# Altium PCB PCB2_DEMO_BOARD.PcbDoc (part 1 of 2)
Units mm, origin at the board's own origin, x right, y up, seen from the top; angles counter-clockwise.
Board outline 60.62 x 54.58 mm, 4 copper layers (Top Layer, GND, POWER, Bottom Layer), stack 0.778 mm thick; 141 components, 123 nets, 491 pads, 190 vias.
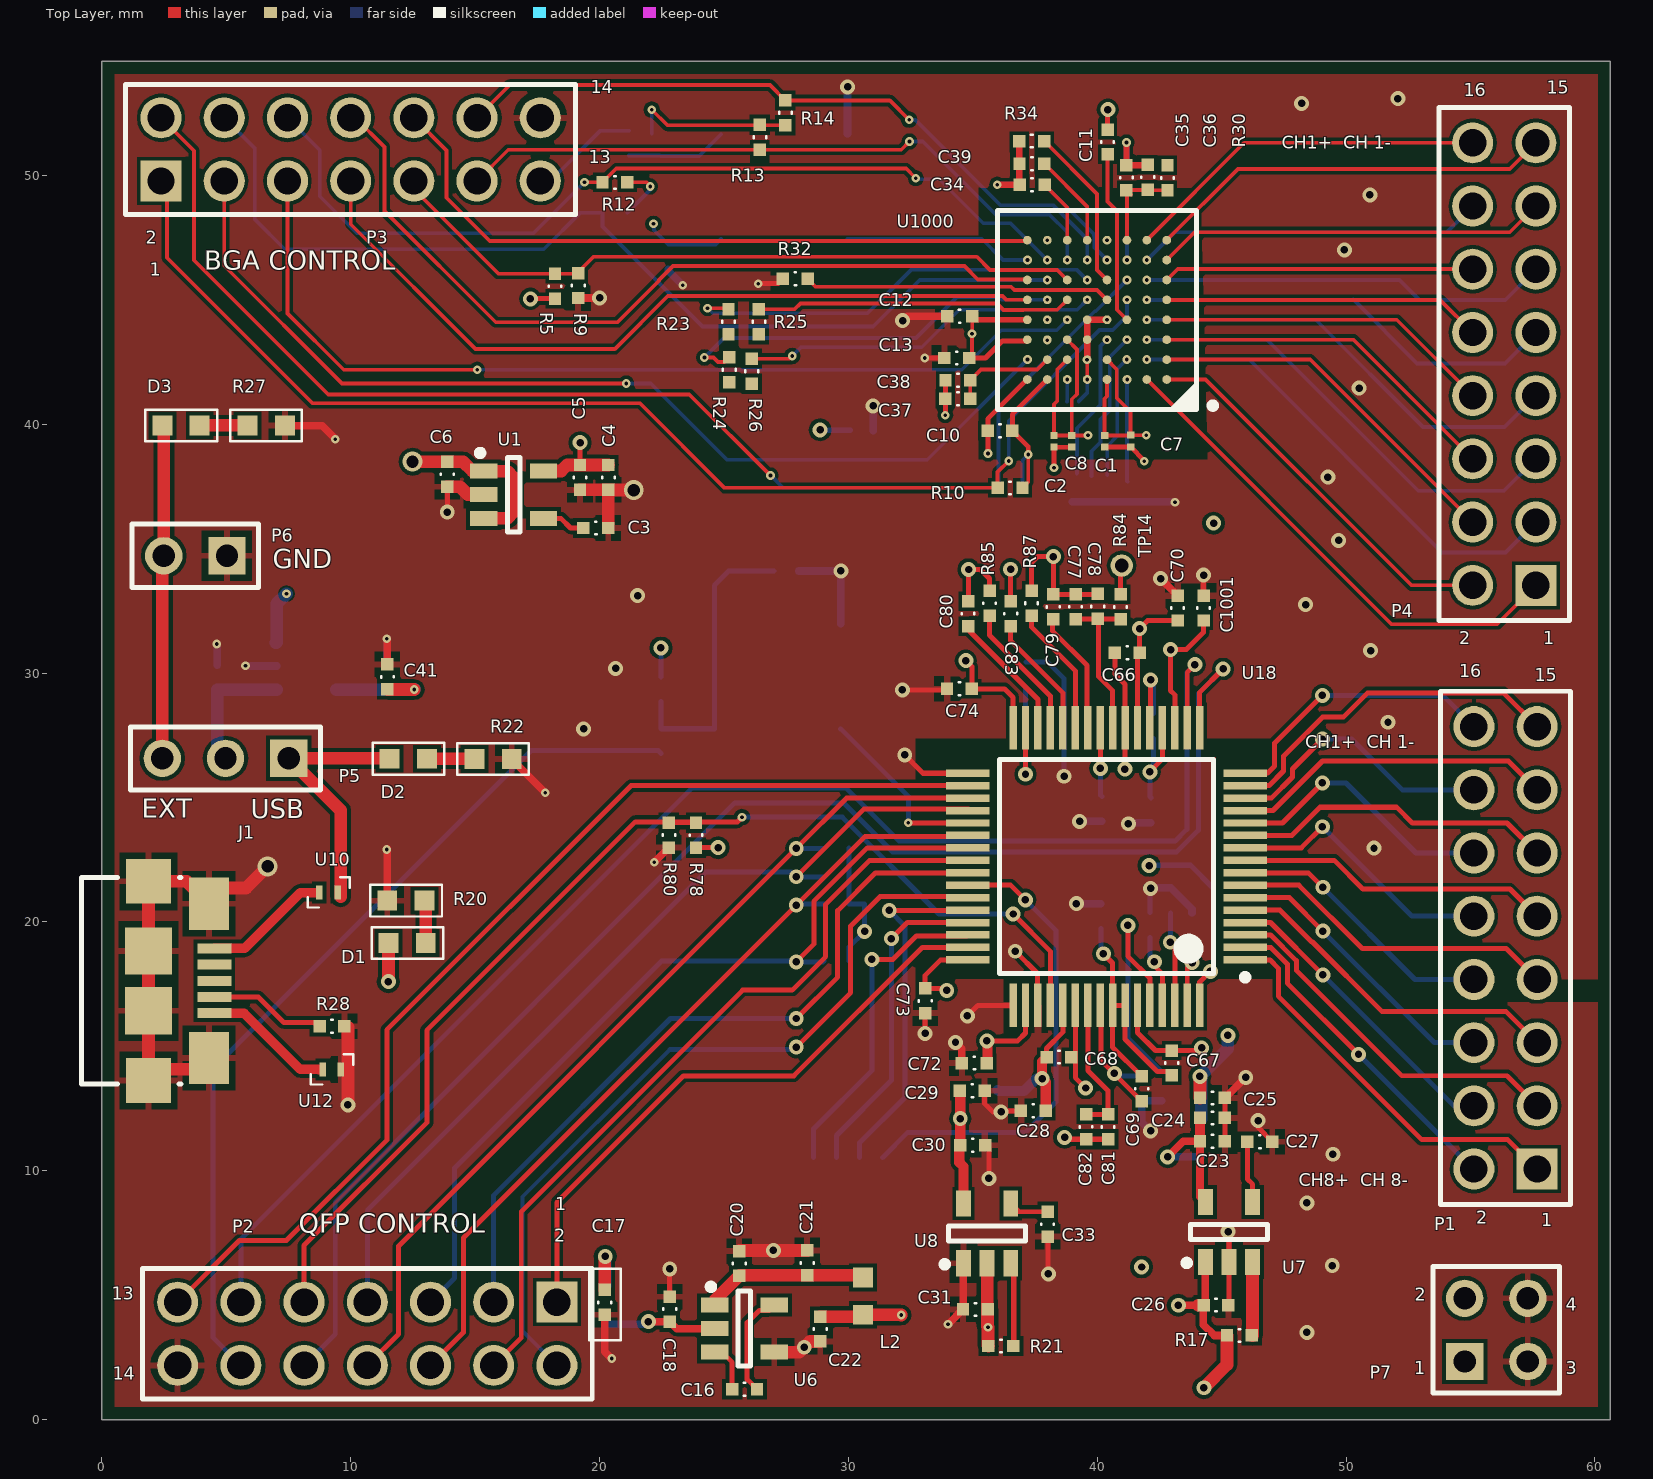
[diagram p0: Top Layer view]
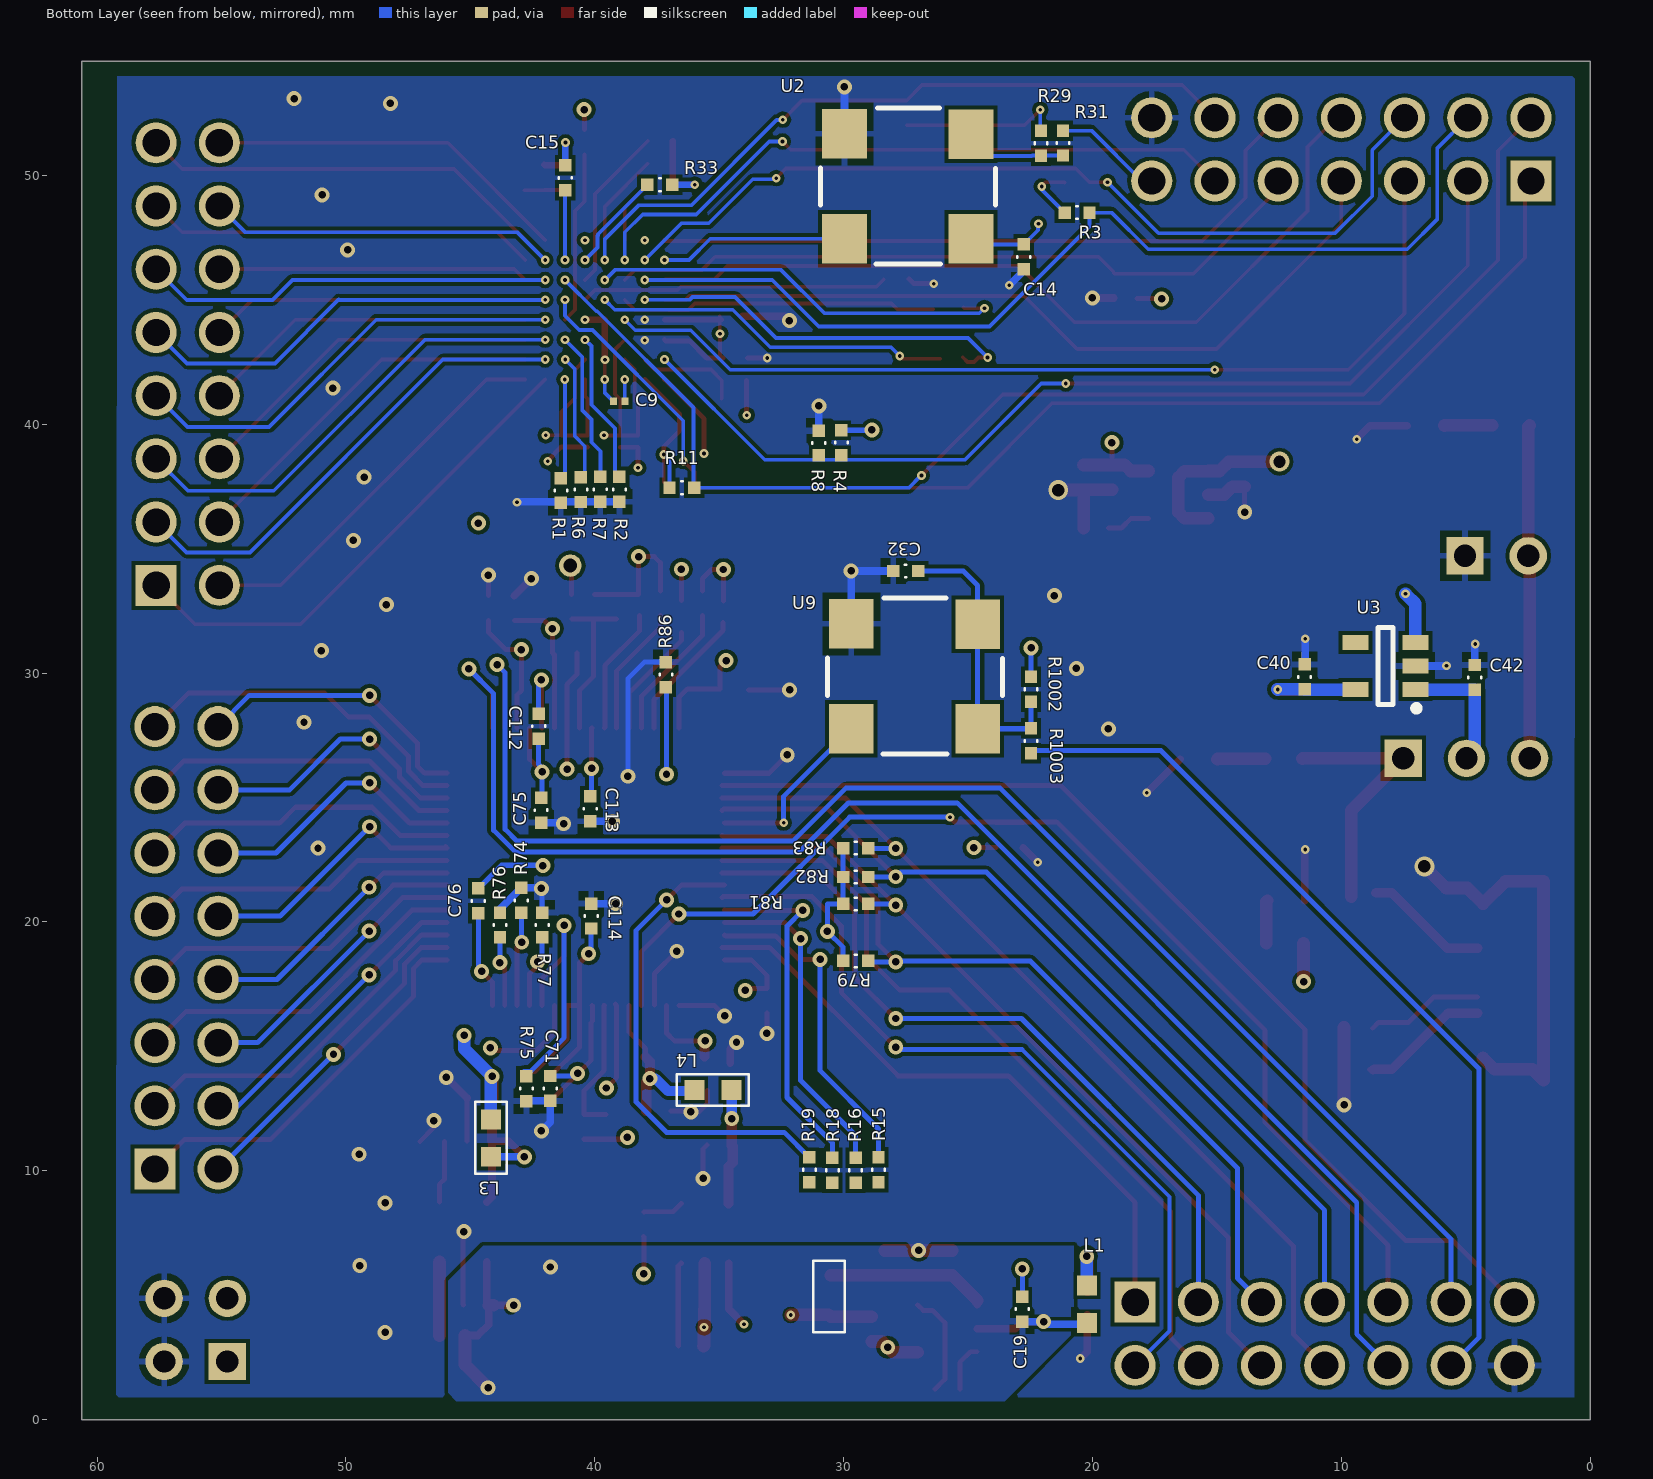
[diagram p1: Bottom Layer view, seen from below]
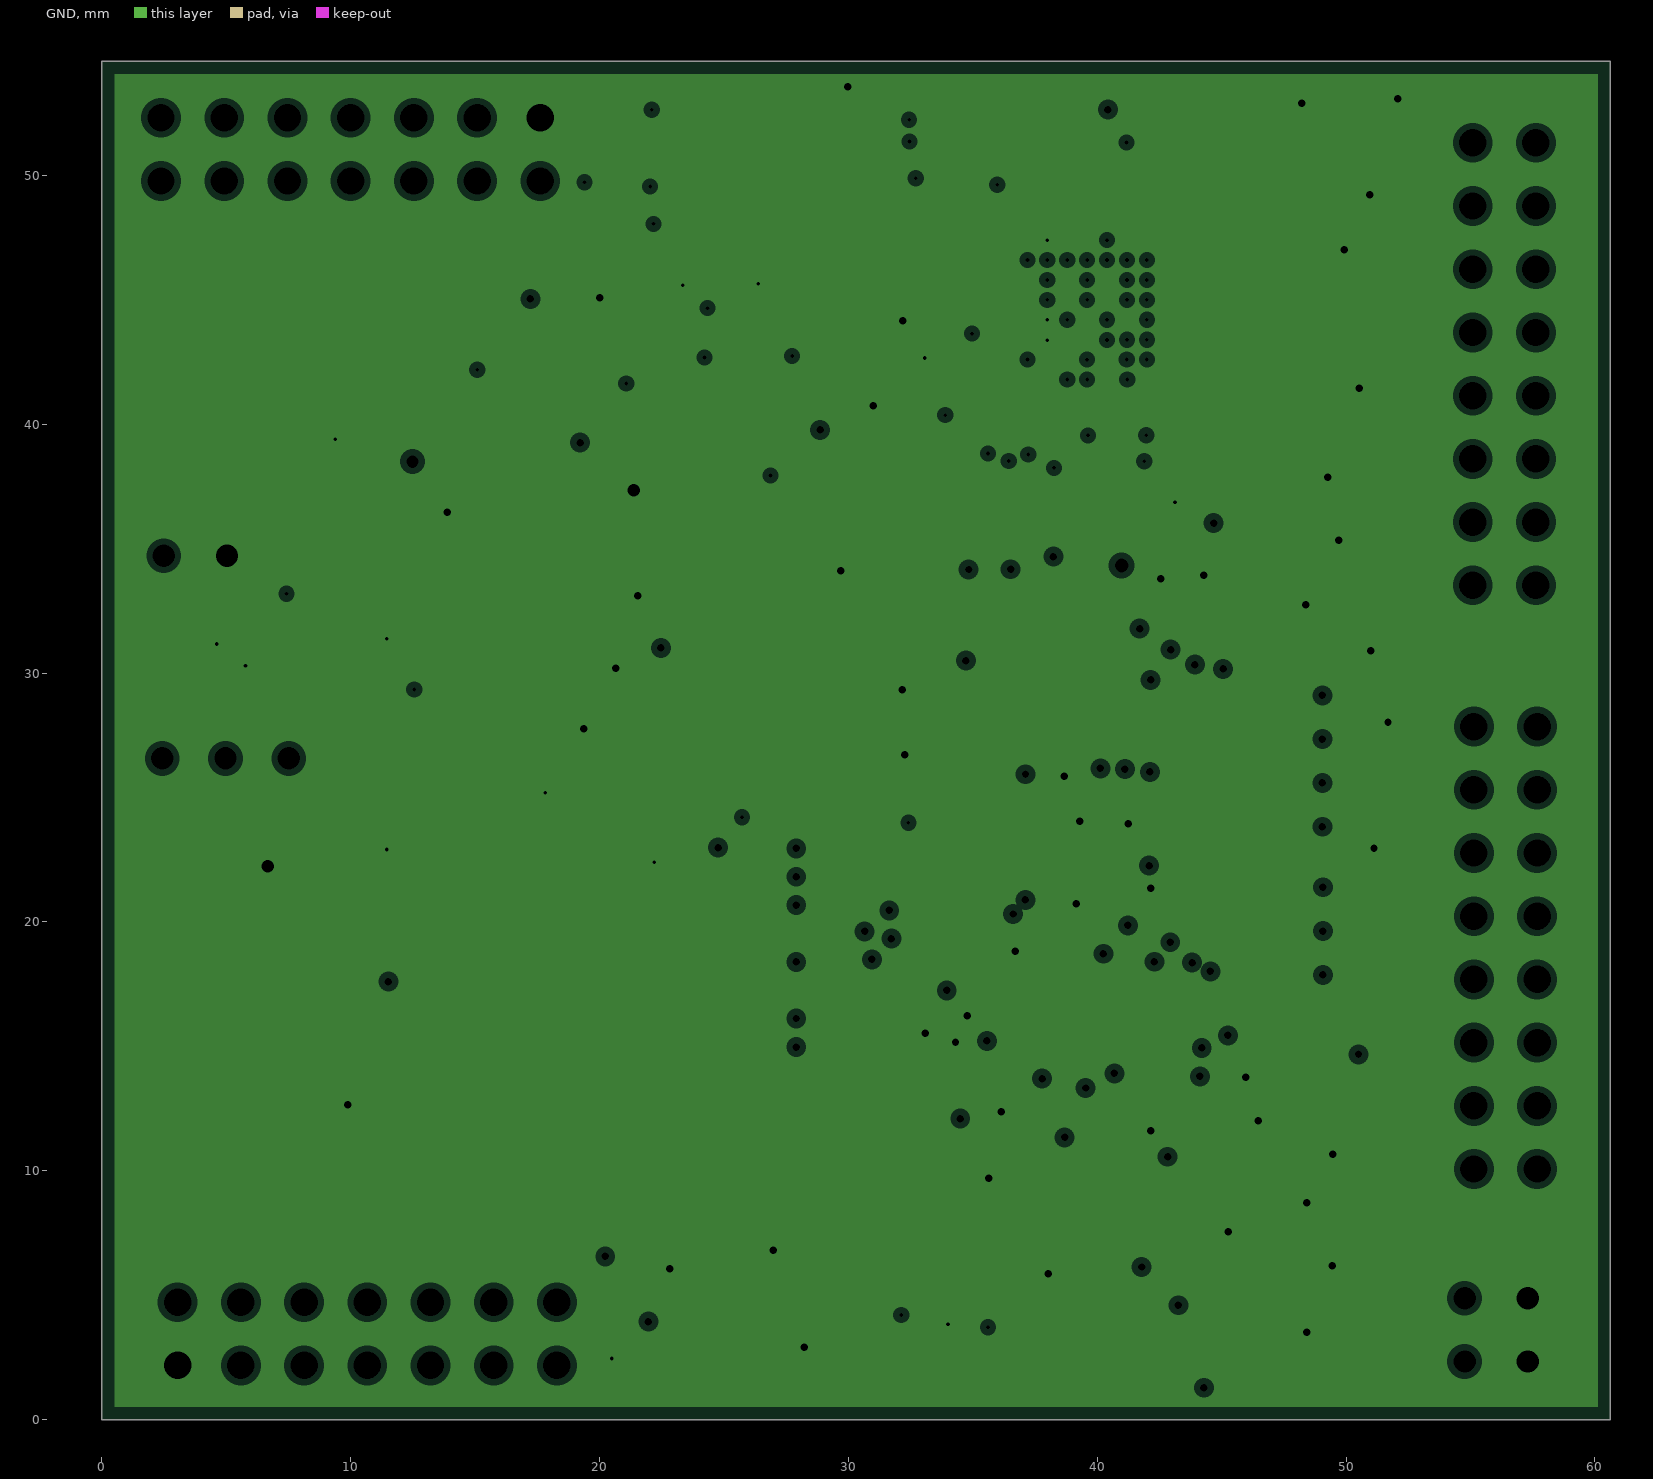
[diagram p2: GND, clearances drawn from the general rule]
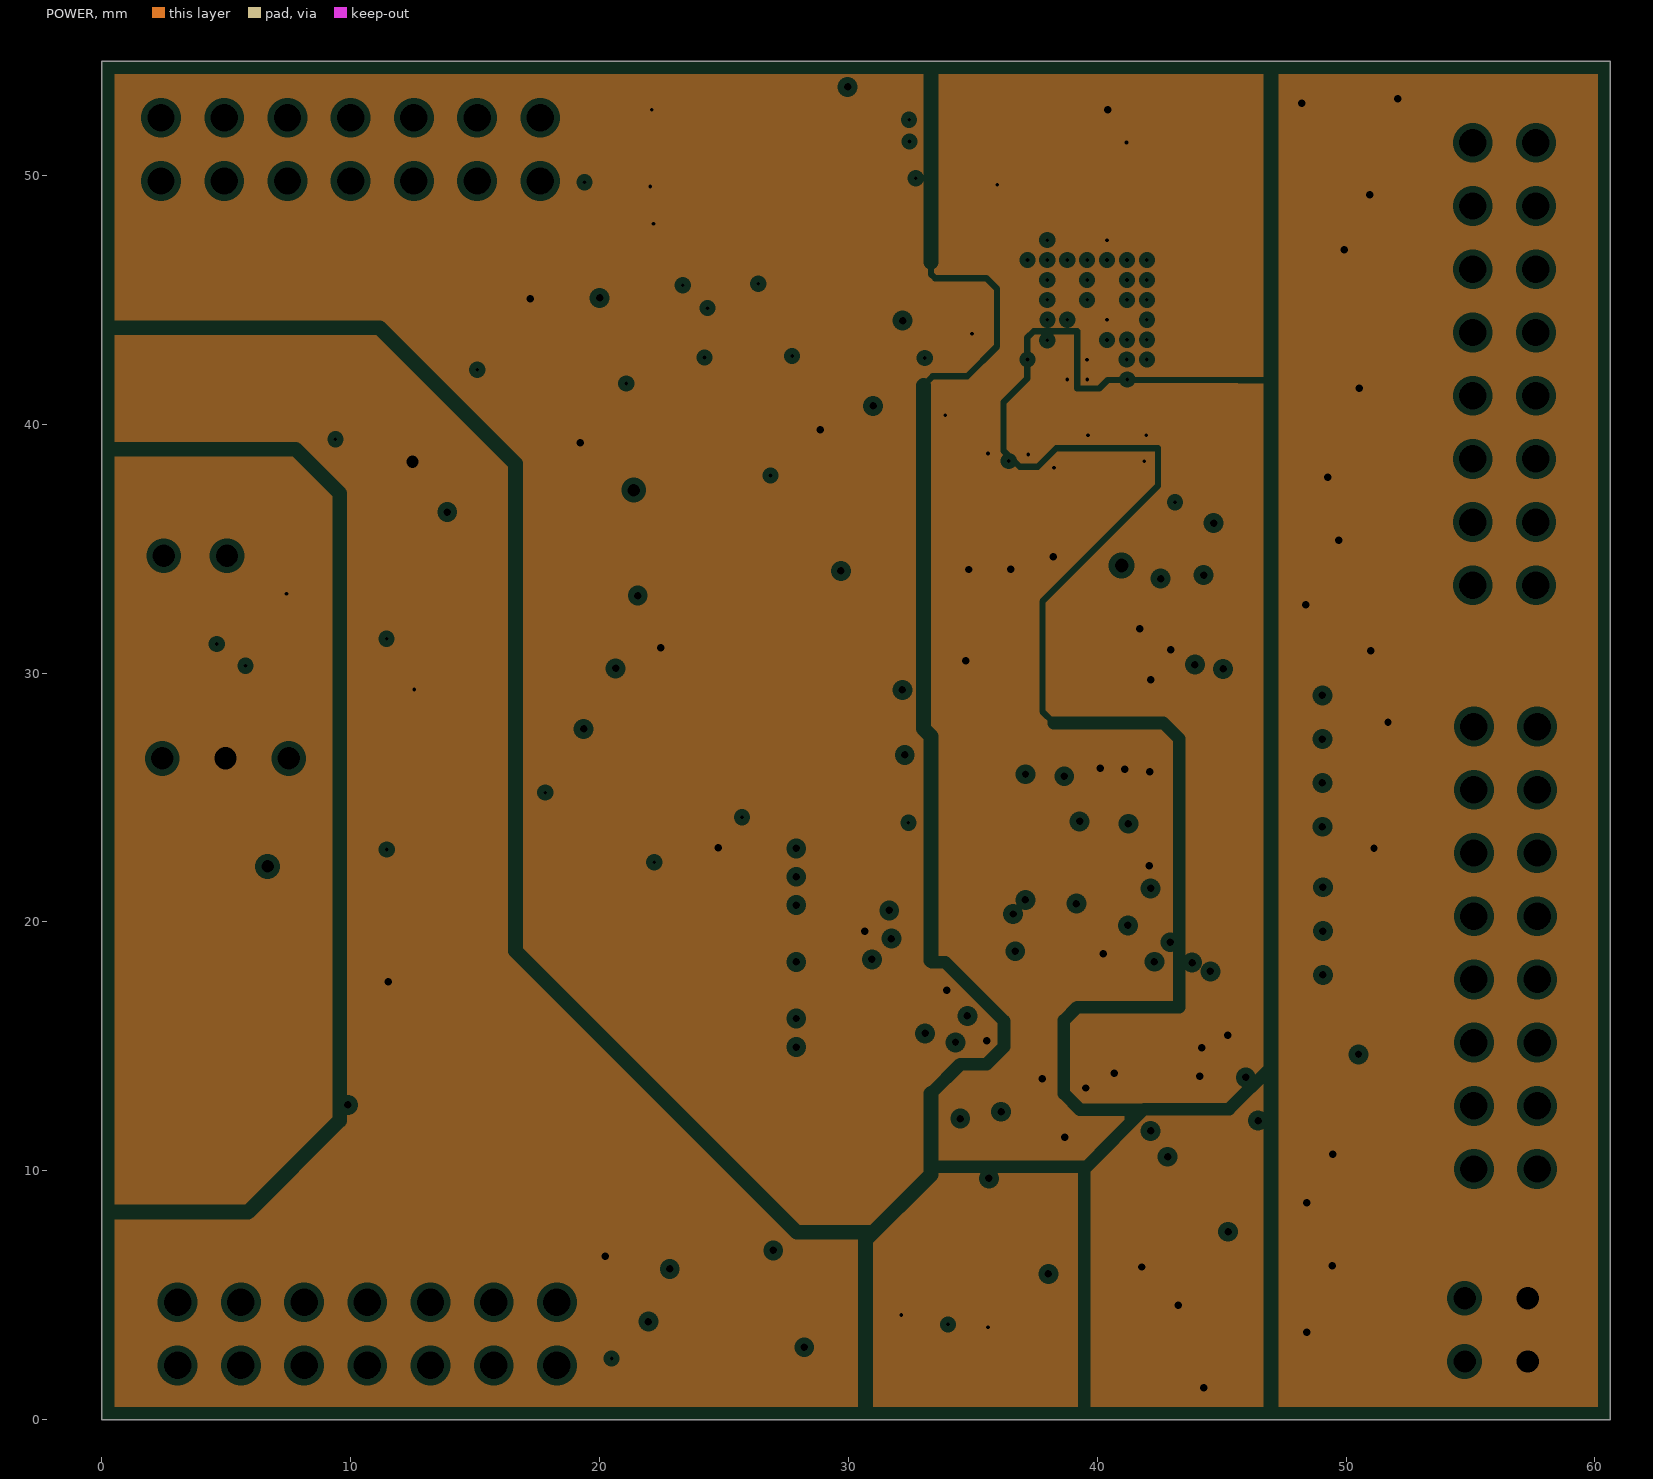
[diagram p3: POWER, clearances drawn from the general rule]

## Layer stack, top to bottom
Top Solder: solder mask 0.0102, Solder Resist, Dk 3.5
Top Layer: signal copper 0.0356
Dielectric 1: core 0.254, FR-4, Dk 4.2
GND: plane copper 0.036, net GND
Dielectric 4: prepreg 0.127, Dk 4.2
POWER: plane copper 0.036, net (Multiple Nets)
Dielectric 5: core 0.254, Dk 4.2
Bottom Layer: signal copper 0.0356
Bottom Solder: solder mask 0.0102, Solder Resist, Dk 3.5

## Board outline
0,54.576 0,0 60.621,0 60.621,54.576

## Design rules (kind name [scope] priority, off if disabled: settings)
AssemblyTestPointUsage [All] p1 off:
AssemblyTestPointUsage AssemblyTestPointUsage_1 [All] p2 off:
AssemblyTestpoint [All] p1 off: testpointundercomponent=TRUE minsize=1.016 maxsize=2.54 preferedsize=1.524 minholesize=0 maxholesize=1.016 preferedholesize=0.813 testpointgrid=0.025 usegrid=TRUE gridtolerance=0 allowsidetop=TRUE allowsidebottom=TRUE
AssemblyTestpoint AssemblyTestpoint_1 [All] p2 off: testpointundercomponent=TRUE minsize=1.016 maxsize=2.54 preferedsize=1.524 minholesize=0 maxholesize=1.016 preferedholesize=0.813 testpointgrid=0.025 usegrid=TRUE gridtolerance=0 allowsidetop=TRUE allowsidebottom=TRUE
BoardOutlineClearance [All] p1: gap=0 ignorepadtopadclearanceinfootprint=FALSE except(0.5: Poly-OutlineEdge)
Clearance [All] p1: gap=0.15 ignorepadtopadclearanceinfootprint=FALSE except(0: Arc-Hole Track-Hole SMDPad-Hole THPad-Hole Via-Hole Fill-Hole Poly-Hole Region-Hole Text-Hole)
ComponentClearance [All] p1: gap=0.2 collisioncheckmode=3 verticalgap=0.2 showdistances=FALSE
DiffPairsRouting DiffPairsRouting_USB [InDifferentialPair('USB')] p1 off: maxlimit=0.33 minlimit=0.33 mostfreqgap=0.33 toplayer_minwidth=0.191 toplayer_maxwidth=0.191 toplayer_prefwidth=0.191 bottomlayer_minwidth=0.191 bottomlayer_maxwidth=0.191 bottomlayer_prefwidth=0.191 maxuncoupledlength=12.7
DiffPairsRouting DiffPairsRouting_U [InDifferentialPair('U')] p2: maxlimit=0.33 minlimit=0.33 mostfreqgap=0.33 toplayer_minwidth=0.381 toplayer_maxwidth=0.381 toplayer_prefwidth=0.381 bottomlayer_minwidth=0.381 bottomlayer_maxwidth=0.381 bottomlayer_prefwidth=0.381 maxuncoupledlength=12.7
FabricationTestPointUsage [All] p1 off: valid=0 allowmultiple=FALSE
FabricationTestPointUsage TestPointUsage [All] p2 off: valid=0 allowmultiple=FALSE
FabricationTestpoint [All] p1 off: side=3 testpointundercomponent=TRUE minsize=1.016 maxsize=2.54 preferedsize=1.524 minholesize=0 maxholesize=1.016 preferedholesize=0.813 testpointgrid=0.025 allowsidetop=TRUE allowsidebottom=TRUE usegrid=TRUE gridtolerance=0
FabricationTestpoint Testpoint [All] p2 off: side=3 testpointundercomponent=TRUE minsize=1.016 maxsize=2.54 preferedsize=1.524 minholesize=0 maxholesize=1.016 preferedholesize=0.813 testpointgrid=0.025 allowsidetop=TRUE allowsidebottom=TRUE usegrid=TRUE gridtolerance=0
FanoutControl Fanout_LCC [IsLCC] p1: bgadir=Out bgaviamode=Centered fanoutstyle=Auto fanoutdirection=Alternating viagrid=0.025 // Fanout_LCC (Default Rule)
FanoutControl Fanout_BGA [IsBGA] p2: bgadir=Out bgaviamode=Centered fanoutstyle=Auto fanoutdirection=Alternating viagrid=0.025 // Fanout_BGA (Default Rule)
FanoutControl Fanout_Small [(CompPinCount < 5)] p3 off: bgadir=Out bgaviamode=Centered fanoutstyle=Auto fanoutdirection=OutThenIn viagrid=0.025 // Fanout_Small (Default Rule)
FanoutControl Fanout_SOIC [IsSOIC] p4: bgadir=Out bgaviamode=Centered fanoutstyle=Auto fanoutdirection=Alternating viagrid=0.025 // Fanout_SOIC (Default Rule)
FanoutControl Fanout_BGA_1 [IsBGA] p6: bgadir=Out bgaviamode=Centered fanoutstyle=Auto fanoutdirection=Alternating viagrid=0.025 // Fanout_BGA (Default Rule)
FanoutControl Fanout_LCC_1 [IsLCC] p7: bgadir=Out bgaviamode=Centered fanoutstyle=Auto fanoutdirection=Alternating viagrid=0.025 // Fanout_LCC (Default Rule)
FanoutControl Fanout_SOIC_1 [IsSOIC] p8: bgadir=Out bgaviamode=Centered fanoutstyle=Auto fanoutdirection=Alternating viagrid=0.025 // Fanout_SOIC (Default Rule)
FanoutControl Fanout_Small_1 [(CompPinCount < 5)] p9: bgadir=Out bgaviamode=Centered fanoutstyle=Auto fanoutdirection=OutThenIn viagrid=0.025 // Fanout_Small (Default Rule)
FanoutControl Fanout_Default_1 [All] p10: bgadir=Out bgaviamode=Centered fanoutstyle=Auto fanoutdirection=Alternating viagrid=0.025 // Fanout_Default (Default Rule)
HoleSize [All] p1: absolutevalues=TRUE maxlimit=1.321 minlimit=0.15 maxpercent=80.000 minpercent=20.000
HoleToHoleClearance [All] p1 off: gap=0.254 allowstackedmicrovias=TRUE
MatchedLengths [InDifferentialPair ('USB')] p1: tolerance=5 checknetsindiffpair=TRUE checkdiffpairvsdiffpair=FALSE checkxsignals=FALSE checkothers=FALSE
MinimumSolderMaskSliver [All] p1 off: minsoldermaskwidth=0.1
PlaneClearance [All] p1: clearance=0.25
PlaneConnect [All] p1: pad.planeconnectstyle=Relief pad.reliefexpansion=0.508 pad.reliefentries=4 pad.reliefconductorwidth=0.254 pad.reliefairgap=0.254 via.planeconnectstyle=Direct via.reliefexpansion=0.508 via.reliefentries=4 via.reliefconductorwidth=0.254 via.reliefairgap=0.254
PolygonConnect [all] p1: thpad.connectstyle=Relief thpad.reliefconductorwidth=0.254 thpad.reliefentries=4 thpad.polygonreliefangle="90 Angle" thpad.airgapwidth=0.254 smdpad.connectstyle=Relief smdpad.reliefconductorwidth=0.254 smdpad.reliefentries=4 smdpad.polygonreliefangle="90 Angle" smdpad.airgapwidth=0.254 via.connectstyle=Direct via.reliefconductorwidth=0.254 via.reliefentries=4 via.polygonreliefangle="90 Angle" via.airgapwidth=0.254
RoutingVias [All] p1: holewidth=0.3 width=0.6 viastyle="Blind Buried (Adjacent Layers)" minholewidth=0.15 minwidth=0.35 maxholewidth=0.6 maxwidth=0.8
ShortCircuit ShortCircuit_1 [All] p1: allowed=FALSE
ShortCircuit [All] p2: allowed=FALSE
SilkToBoardRegionClearance [All] p1 off:
SilkToSilkClearance [All] p1 off: silktosilkclearance=0.1
SilkToSolderMaskClearance SilkscreenOverComponentPads [IsPad] p1: minsilkscreentomaskgap=0.1 clearancetoexposedcopper=TRUE
SolderMaskExpansion [All] p1: expansion=0.074 istentingtop=FALSE
UnRoutedNet UnRoutedNet_1 [All] p1:
UnRoutedNet [All] p2 off:
Width Width_DIFFPAIR_U [InDifferentialPair('U')] p1: maxlimit=0.191 minlimit=0.191 preferedwidth=0.191 minimp=50.000000 maximp=50.000000 favimp=50.000000
Width Width_DIFFPAIR_USB [InDifferentialPair('USB')] p2: maxlimit=0.191 minlimit=0.191 preferedwidth=0.191 minimp=50.000000 maximp=50.000000 favimp=50.000000
Width "Width_power and gnd_1" [(InNet('AVDD') OR InNet('AVSS') OR InNet('AVDD_LOC') OR InNet('AVSS_LOC') OR InNet('VCC_33') OR InNet('VCC_33_F') OR InNet('VCC_BTOOTH') OR InNet('VCC_MEMS') OR InNet('VCC_SDCARD') OR InNet('VD12_LOC') OR InNet('VD33_LOC') OR InNet('VSYS_NEG') OR InNet('VDDA33') OR InNet('VDDD12') OR InNet('VDDD33') OR InNet('VSYS') OR InNet('VUSB') or InNet ('GND'))] p3: maxlimit=0.508 minlimit=0.15 preferedwidth=0.508 minimp=50.000000 maximp=50.000000 favimp=50.000000
Width [All] p4: maxlimit=0.508 minlimit=0.15 preferedwidth=0.2
10 further rules are at their usual default settings.

## Components (designator, comment, footprint, x,y, rotation, side; value= is the part's Value field where it differs from the comment)
C1 "0.10µF" SMD-0201C 40.292,39.31 r270 top
C2 "0.10µF" SMD-0201C 38.261,39.31 r270 top
C3 "Cap" "cap_0402_R - modified" 20.35,35.828 r180 top value=100nF
C4 "Cap" "cap_0402_R - modified" 20.358,38.36 r270 top value=1uF
C5 "Cap" "cap_0402_R - modified" 19.215,37.36 r90 top value=10nF
C6 "Cap" "cap_0402_R - modified" 13.881,37.487 r90 top value=1.0uF
C7 "0.10µF" SMD-0201C 41.337,39.321 r270 top
C8 "0.10µF" SMD-0201C 38.975,39.31 r270 top
C9 "0.10µF" SMD-0201C 39.016,40.915 r0 bottom
C10 "Cap" "cap_0402_R - modified" 36.591,39.731 r180 top value=1uF
C11 "NC" "cap_0402_R - modified" 40.412,51.839 r270 top value=1nF
C12 "Cap" "cap_0402_R - modified" 33.971,44.334 r0 top value=0.1uF
C13 "Cap" "cap_0402_R - modified" 33.853,42.659 r0 top value=0.1uF
C14 "Cap" "cap_0402_R - modified" 22.761,47.222 r270 bottom value=1uF
C15 "Cap" "cap_0402_R - modified" 41.179,50.401 r270 bottom value=1uF
C16 "Cap" "cap_0402_R - modified" 25.326,1.224 r0 top value=1uF
C17 "Cap" "cap_0402_R - modified" 20.207,5.211 r270 top value=10uF
C18 "Cap" "cap_0402_R - modified" 22.819,3.938 r90 top value=10uF
C19 "Cap" "cap_0402_R - modified" 22.819,3.938 r90 bottom value=1uF
C20 "Cap" "cap_0402_R - modified" 25.607,5.771 r90 top value=1uF
C21 "Cap" "cap_0402_R - modified" 28.339,5.797 r90 top value=10uF
C22 "Cap" "cap_0402_R - modified" 28.87,4.139 r270 top value=10uF
C23 "Cap" "cap_0402_R - modified" 44.127,11.188 r0 top value=2.2uF
C24 "Cap" "cap_0402_R - modified" 44.127,12.121 r0 top value=10uF
C25 "Cap" "cap_0402_R - modified" 44.127,12.924 r0 top value=10uF
C26 "Cap" "cap_0402_R - modified" 44.27,4.603 r0 top value=1uF
C27 "C" "cap_0402_R - modified" 46.03,11.168 r0 top value=100nF
C28 "Cap" "cap_0402_R - modified" 37.929,12.407 r180 top value=10uF
C29 "Cap" "cap_0402_R - modified" 34.476,13.216 r0 top value=2.2uF
C30 "Cap" "cap_0402_R - modified" 34.495,11.026 r0 top value=10uF
C31 "Cap" "cap_0402_R - modified" 35.604,4.425 r180 top value=2.2uF
C32 "Cap" "cap_0402_R - modified" 27.004,34.1 r0 bottom value=1uF
C33 "C" "cap_0402_R - modified" 38.006,8.351 r270 top value=10nF
C34 "Cap" "cap_0402_R - modified" 36.882,49.622 r0 top value=1uF
C35 "Cap" "cap_0402_R - modified" 41.173,50.406 r270 top value=10uF
C36 "Cap" "cap_0402_R - modified" 42.031,50.426 r270 top value=0.1uF
C37 "Cap" "cap_0402_R - modified" 33.896,41.024 r0 top value=0.1uF
C38 "Cap" "cap_0402_R - modified" 33.9,41.768 r0 top value=1uF
C39 "Cap" "cap_0402_R - modified" 36.876,50.467 r0 top value=22uF
C40 "Cap" "cap_0402_R - modified" 11.474,30.346 r270 bottom value=100nF
C41 "Cap" "cap_0402_R - modified" 11.474,29.346 r90 top value=1uF
C42 "Cap" "cap_0402_R - modified" 4.631,30.322 r270 bottom value=1.0uF
C66 "Cap" "cap_0402_R - modified" 40.705,30.812 r0 top value=1uF
C67 "Cap" "cap_0402_R - modified" 42.991,13.83 r90 top value=0.1uF
C68 "Cap" "cap_0402_R - modified" 37.962,14.569 r0 top value=1uF
C69 "Cap" "cap_0402_R - modified" 41.786,13.796 r270 top value=0.1uF
C70 "Cap" "cap_0402_R - modified" 43.229,33.11 r270 top value=1uF
C71 "Cap" "cap_0402_R - modified" 41.787,12.807 r90 bottom value=0.1uF
C72 "Cap" "cap_0402_R - modified" 34.557,14.327 r0 top value=1uF
C73 "Cap" "cap_0402_R - modified" 33.084,16.328 r90 top value=0.1uF
C74 "Cap" "cap_0402_R - modified" 34.962,29.366 r180 top value=1uF
C75 "Cap" "cap_0402_R - modified" 42.154,24.988 r270 bottom value=1uF
C76 "NC" "cap_0402_R - modified" 44.675,21.345 r270 bottom value=1000pF
C77 "Cap" "cap_0402_R - modified" 39.13,33.164 r270 top value=10uF
C78 "Cap" "cap_0402_R - modified" 40.023,33.178 r270 top value=0.1uF
C79 "Cap" "cap_0402_R - modified" 38.237,33.162 r270 top value=1uF
C80 "Cap" "cap_0402_R - modified" 34.812,32.885 r270 top value=1uF
C81 "Cap" "cap_0402_R - modified" 40.434,11.261 r90 top value=0.1uF
C82 "Cap" "cap_0402_R - modified" 39.549,11.265 r90 top value=1uF
C83 "Cap" "cap_0402_R - modified" 36.527,32.885 r270 top value=22uF
C112 "Cap" "cap_0402_R - modified" 42.256,27.363 r90 bottom value=0.1uF
C113 "Cap" "cap_0402_R - modified" 40.181,24.044 r90 bottom value=1uF
C114 "Cap" "cap_0402_R - modified" 40.142,20.734 r270 bottom value=0.1uF
C1001 "Cap" "cap_0402_R - modified" 44.27,33.11 r270 top value=1uF
D1 "LED3" 0603#1 12.266,19.146 r0 top
D2 "LED3" 0603#1 12.309,26.555 r0 top
D3 "LED3" 0603#1 3.181,39.949 r0 top
J1 "Connector Micro USB_(b)" CONNECTOR_MICRO_USB_B_TYPE 1.875,17.63 r270 top
L1 "Inductor" 0603#2 20.223,4.634 r90 bottom value=3.3uH
L2 "Inductor" 0603#2 30.59,4.962 r90 top value=3.3uH
L3 "Inductor" 0603#1 44.174,11.312 r90 bottom value=3.3uH
L4 "Inductor" 0603#1 35.246,13.248 r0 bottom value=3.3uH
P1 "Header 16" 61301621121 56.405,18.957 r90 top
P2 "Header 14" 61301421121 10.666,3.448 r180 top
P3 "Header 14" 61301421121 9.997,51.042 r0 top
P4 "Header 16" 61301621121 56.355,42.415 r90 top
P5 "Header 3" HDR1X3 7.509,26.569 r180 top
P6 "Header 2" HDR1X2 5.027,34.711 r180 top
P7 "Header 2X2" HDR2X2 54.762,2.334 r0 top
R1 "NC" "cap_0402_R - modified" 41.362,36.836 r90 bottom value=0R
R2 "NC" "cap_0402_R - modified" 39.006,36.88 r90 bottom value=0R
R3 "Res3" "res_0402_R - modified" 21.117,48.5 r180 bottom value=100K
R4 "NC" "cap_0402_R - modified" 30.09,38.757 r90 bottom value=10K
R5 "NC" "cap_0402_R - modified" 18.21,46.043 r270 top value=10K
R6 "NC" "cap_0402_R - modified" 40.558,36.873 r90 bottom value=0R
R7 "NC" "cap_0402_R - modified" 39.777,36.882 r90 bottom value=0R
R8 "NC" "cap_0402_R - modified" 30.995,39.742 r270 bottom value=10K
R9 "NC" "cap_0402_R - modified" 19.14,45.07 r90 top value=10K
R10 "" "cap_0402_R - modified" 35.995,37.441 r0 top value=10K
R11 "" "cap_0402_R - modified" 35.995,37.441 r0 bottom value=10K
R12 "Res3" "res_0402_R - modified" 21.118,49.717 r180 top value=100K
R13 "Res3" "res_0402_R - modified" 26.441,51.027 r90 top value=100K
R14 "Res3" "res_0402_R - modified" 27.465,53.008 r270 top value=100K
R15 "Res3" "res_0402_R - modified" 28.596,9.533 r90 bottom value=100K
R16 "Res3" "res_0402_R - modified" 29.519,9.525 r90 bottom value=100K
R17 "R" "cap_0402_R - modified" 46.213,3.38 r180 top value=0R
R18 "Res3" "res_0402_R - modified" 30.448,9.525 r90 bottom value=100K
R19 "Res3" "res_0402_R - modified" 31.375,9.533 r90 bottom value=100K
R20 "R" 0603#1 12.218,20.851 r0 top value=1K
R21 "R" "cap_0402_R - modified" 35.628,2.956 r0 top value=0R
R22 "R" 0603#1 15.722,26.539 r180 top value=1K
R23 "Res3" "res_0402_R - modified" 25.18,43.615 r90 top value=100K
R24 "Res3" "res_0402_R - modified" 25.211,41.691 r90 top value=100K
R25 "Res3" "res_0402_R - modified" 26.405,43.615 r90 top value=100K
R26 "Res3" "res_0402_R - modified" 26.118,41.629 r90 top value=100K
R27 "R" 0603#1 6.609,39.94 r180 top value=1K
R28 "NC" "cap_0402_R - modified" 9.749,15.805 r180 top value=0K
R29 "Res3" "res_0402_R - modified" 22.067,51.789 r270 bottom value=10K
R30 "NC" "cap_0402_R - modified" 42.822,50.399 r270 top value=0R
R31 "NC" "cap_0402_R - modified" 21.182,51.795 r270 bottom value=0R
R32 "" "cap_0402_R - modified" 28.367,45.839 r180 top value=0R
R33 "NC" "cap_0402_R - modified" 36.882,49.622 r0 bottom value=10K
R34 "NC" "res_0402_R - modified" 36.868,51.377 r0 top value=10K
R74 "NC" "cap_0402_R - modified" 42.953,21.363 r270 bottom value=0K
R75 "NC" "cap_0402_R - modified" 42.745,12.799 r90 bottom value=0K
R76 "NC" "cap_0402_R - modified" 43.807,20.375 r270 bottom value=0K
R77 "NC" "cap_0402_R - modified" 42.111,20.375 r270 bottom value=0K
R78 "NC" "cap_0402_R - modified" 23.874,23.983 r270 top value=10K
R79 "Res3" "res_0402_R - modified" 29.017,18.43 r0 bottom value=10K
R80 "NC" "cap_0402_R - modified" 22.786,22.983 r90 top value=10K
R81 "Res3" "res_0402_R - modified" 30.017,20.723 r180 bottom value=100K
R82 "Res3" "res_0402_R - modified" 29.017,21.803 r0 bottom value=100K
R83 "Res3" "res_0402_R - modified" 29.017,22.967 r0 bottom value=100K
R84 "NC" "cap_0402_R - modified" 40.937,33.159 r270 top value=0K
R85 "NC" "cap_0402_R - modified" 35.672,33.306 r270 top value=10K
R86 "NC" "cap_0402_R - modified" 37.138,29.437 r90 bottom value=0K
R87 "Res3" "res_0402_R - modified" 37.363,33.306 r270 top value=10K
R1002 "Res3" "res_0402_R - modified" 22.468,29.849 r270 bottom value=10K
R1003 "NC" "cap_0402_R - modified" 22.468,26.773 r90 bottom value=0K
TP14 "1-PIN" Testpt_055 40.981,34.317 r90 top
U1 "TPS79333" "SOT_23__DBV_(R - PDSO - G5)" 16.548,37.166 r0 top
U2 "OSC_ADS1298" "HC735 - OSC ADS1298" 24.883,47.451 r0 bottom
U3 "TLV70237" "SOT23__DDC__(R - PDSO-  G5)" 8.224,30.284 r0 bottom
U6 "TPS60403" "SOT_23__DBV_(R - PDSO - G5)" 25.821,3.657 r0 top
U7 "TPS73225" "SOT23__DDC__(R - PDSO-  G5)" 45.296,7.538 r90 top
U8 "TPS72325" "SOT23__DDC__(R - PDSO-  G5)" 35.572,7.483 r90 top
U9 "OSC_ADS1298" "HC735 - OSC ADS1298" 24.61,27.76 r0 bottom
U10 "BLM15PD121SN1" BLM15PD121SN1 9.477,21.178 r180 top
U12 "BLM15PD121SN1" BLM15PD121SN1 9.609,14.065 r180 top
U18 "ADS1298" "S-PQFP - G64 - ADS1298" 40.366,22.223 r180 top
U1000 "ADS1298CZXGR" BGA64C80P8X8_800X800X106 39.992,44.595 r180 top

## Footprints (in the part's own frame and the unit in brackets; to place one, negate y for a bottom-side part, rotate by r counter-clockwise, add the part's x,y. Pads: shape width x height; smd on the part's side, far side on the other; paste and mask are expansions set on the pad)
0603#1 [mm]
  rect 0.8x0.8 smd: 1(-0.75,0) 2(0.75,0)
  silkscreen extent -1.43,-0.64 1.45,0.64
0603#2 [mm]
  rect 0.8x0.8 smd: 1(0.75,0) 2(-0.75,0)
61301421121 [mm] "Pin Header, pitch 2.54 mm, THT, Vertical, dual row, 14p"
  rect 1.65x1.65 hole 1.1: 1(-7.62,-1.27)
  round 1.65 hole 1.1: 2(-7.62,1.27) 3(-5.08,-1.27) 4(-5.08,1.27) 5(-2.54,-1.27) 6(-2.54,1.27) 7(0,-1.27) 8(0,1.27) 9(2.54,-1.27) 10(2.54,1.27) 11(5.08,-1.27) 12(5.08,1.27) 13(7.62,-1.27) 14(7.62,1.27)
  silkscreen extent -9.04,-2.62 9.04,2.62, body extent -8.89,-2.54 8.89,2.54, height 8.59
61301621121 [mm] "Pin Header, pitch 2.54 mm, THT, Vertical, dual row, 16p"
  rect 1.65x1.65 hole 1.1: 1(-8.89,-1.27)
  round 1.65 hole 1.1: 2(-8.89,1.27) 3(-6.35,-1.27) 4(-6.35,1.27) 5(-3.81,-1.27) 6(-3.81,1.27) 7(-1.27,-1.27) 8(-1.27,1.27) 9(1.27,-1.27) 10(1.27,1.27) 11(3.81,-1.27) 12(3.81,1.27) 13(6.35,-1.27) 14(6.35,1.27) 15(8.89,-1.27) 16(8.89,1.27)
  silkscreen extent -10.31,-2.62 10.31,2.62, body extent -10.16,-2.54 10.16,2.54, height 8.59
BGA64C80P8X8_800X800X106 [mm] "BGA, 64-Leads, Body 8.00x8.00mmx1.06mm, Pitch 0.80mm"
  round 0.35 smd mask+0.075: A1(-2.8,2.8) A2(-2,2.8) A3(-1.2,2.8) A4(-0.4,2.8) A5(0.4,2.8) A6(1.2,2.8) A7(2,2.8) A8(2.8,2.8) B1(-2.8,2) B2(-2,2) B3(-1.2,2) B4(-0.4,2) B5(0.4,2) B6(1.2,2) B7(2,2) B8(2.8,2) C1(-2.8,1.2) C2(-2,1.2) C3(-1.2,1.2) C4(-0.4,1.2) C5(0.4,1.2) C6(1.2,1.2) C7(2,1.2) C8(2.8,1.2) D1(-2.8,0.4) D2(-2,0.4) D3(-1.2,0.4) D4(-0.4,0.4) D5(0.4,0.4) D6(1.2,0.4) D7(2,0.4) D8(2.8,0.4) E1(-2.8,-0.4) E2(-2,-0.4) E3(-1.2,-0.4) E4(-0.4,-0.4) E5(0.4,-0.4) E6(1.2,-0.4) E7(2,-0.4) E8(2.8,-0.4) F1(-2.8,-1.2) F2(-2,-1.2) F3(-1.2,-1.2) F4(-0.4,-1.2) F5(0.4,-1.2) F6(1.2,-1.2) F7(2,-1.2) F8(2.8,-1.2) G1(-2.8,-2) G2(-2,-2) G3(-1.2,-2) G4(-0.4,-2) G5(0.4,-2) G6(1.2,-2) G7(2,-2) G8(2.8,-2) H1(-2.8,-2.8) H2(-2,-2.8) H3(-1.2,-2.8) H4(-0.4,-2.8) H5(0.4,-2.8) H6(1.2,-2.8) H7(2,-2.8) H8(2.8,-2.8)
  silkscreen extent -4.77,-4 4,4, body extent -4,-4 4,4, height 1.06
BLM15PD121SN1 [mm] "Chip Inductor, 2-Leads, Body 1,00x0,50mm, IPC Medium Density"
  rect 0.26x0.55 smd mask+0.1: 1(0,0) 2(0.74,0)
  silkscreen extent -0.49,-0.61 1.21,0.6
"cap_0402_R - modified" [mm] "0402_R"
  rect 0.5x0.5 smd paste-0.05: 1(0,0) 2(1,0)
  silkscreen extent 0.47,-0.26 0.53,0.25, body extent -0.13,-0.25 1.14,0.25, height 0.5
CONNECTOR_MICRO_USB_B_TYPE [mm] "connettore micro usb B type"
  rect 0.4x1.35 smd: 1(-1.3,2.65) 2(-0.65,2.65) 3(0,2.65) 4(0.65,2.65) 5(1.3,2.65)
  rect 1.8x1.8 smd mask+0.2: 6(-4,0) 6(4,0)
  rect 2.1x1.6 smd mask+0.2: 6(-3.1,2.43) 6(3.1,2.43)
  rect 1.9x1.9 smd mask+0.2: 6(-1.2,0) 6(1.2,0)
  round 0.4 on Top Overlay mask+0.2: 7(-2.464,3.81)
  silkscreen extent -4.15,-2.69 4.15,1.31, body extent -4,-2.55 4,2.55, height 2.8
"HC735 - OSC ADS1298" [mm] "Footprint oscillatore ABM3B-8.000MHZ-B2-T del micro"
  rect 1.8x2 smd mask+0.2: 1(0,-4.2) 2(5.08,-4.216) 3(5.08,0) 4(0,0)
  round 1 on Bottom Overlay mask+0.2: 5(-1.906,-4.608)
  silkscreen extent -0.99,-5.26 6.05,1.02, body extent -0.03,-4.22 5.05,0, height 1.1
HDR1X2 [mm] "Connector; Header; 2 Position"
  rect 1.5x1.5 hole 0.9: 1(0,0)
  round 1.5 hole 0.9: 2(2.54,0)
  silkscreen extent -1.27,-1.27 3.81,1.27
HDR1X3 [mm] "Connector; Header; 3 Position"
  rect 1.5x1.5 hole 0.9: 1(0,0)
  round 1.5 hole 0.9: 2(2.54,0) 3(5.08,0)
  silkscreen extent -1.27,-1.27 6.35,1.27
HDR2X2 [mm] "Connector; Header; 2x2 Position"
  rect 1.5x1.5 hole 0.9: 1(0,0)
  round 1.5 hole 0.9: 2(0,2.54) 3(2.54,0) 4(2.54,2.54)
  silkscreen extent -1.27,-1.27 3.81,3.81
"res_0402_R - modified" [mm] "0402_R"
  rect 0.5x0.5 smd paste-0.05: 1(0,0) 2(1,0)
  silkscreen extent 0.46,-0.25 0.54,0.25, body extent -0.13,-0.25 1.14,0.25, height 0.3
"S-PQFP - G64 - ADS1298" [mm] "TSQFP, 64-Leads, Body 10,00x10,00mm, Pitch 0,50mm, IPC Medium Density"
  rect 1.75x0.3 smd: 1(-5.575,3.75) 2(-5.575,3.25) 3(-5.575,2.75) 4(-5.575,2.25) 5(-5.575,1.75) 6(-5.575,1.25) 7(-5.575,0.75) 8(-5.575,0.25) 9(-5.575,-0.25) 10(-5.575,-0.75) 11(-5.575,-1.25) 12(-5.575,-1.75) 13(-5.575,-2.25) 14(-5.575,-2.75) 15(-5.575,-3.25) 16(-5.575,-3.75) 33(5.575,-3.75) 34(5.575,-3.25) 35(5.575,-2.75) 36(5.575,-2.25) 37(5.575,-1.75) 38(5.575,-1.25) 39(5.575,-0.75) 40(5.575,-0.25) 41(5.575,0.25) 42(5.575,0.75) 43(5.575,1.25) 44(5.575,1.75) 45(5.575,2.25) 46(5.575,2.75) 47(5.575,3.25) 48(5.575,3.75)
  rect 0.3x1.75 smd: 17(-3.75,-5.575) 18(-3.25,-5.575) 19(-2.75,-5.575) 20(-2.25,-5.575) 21(-1.75,-5.575) 22(-1.25,-5.575) 23(-0.75,-5.575) 24(-0.25,-5.575) 25(0.25,-5.575) 26(0.75,-5.575) 27(1.25,-5.575) 28(1.75,-5.575) 29(2.25,-5.575) 30(2.75,-5.575) 31(3.25,-5.575) 32(3.75,-5.575) 49(3.75,5.575) 50(3.25,5.575) 51(2.75,5.575) 52(2.25,5.575) 53(1.75,5.575) 54(1.25,5.575) 55(0.75,5.575) 56(0.25,5.575) 57(-0.25,5.575) 58(-0.75,5.575) 59(-1.25,5.575) 60(-1.75,5.575) 61(-2.25,5.575) 62(-2.75,5.575) 63(-3.25,5.575) 64(-3.75,5.575)
  silkscreen extent -5.7,-4.3 4.3,4.57, body extent -5,-5 5,5, height 1.2
SMD-0201C [mm] "SMD-0201"
  rect 0.28x0.3 smd: 1(-0.235,0) 2(0.235,0)
  body extent -0.3,-0.15 0.3,0.15, height 0.3
"SOT23__DDC__(R - PDSO-  G5)" [mm]
  rect 1.05x0.6 smd: 1(-1.2,0.95) 2(-1.2,0) 3(-1.2,-0.95) 4(1.2,-0.95) 5(1.2,0.95)
  silkscreen extent -1.37,-1.55 0.3,1.83, body extent -0.87,-1.52 0.87,1.53, height 1.1
"SOT_23__DBV_(R - PDSO - G5)" [mm]
  rect 1.1x0.6 smd: 1(-1.2,0.95) 2(-1.2,0) 3(-1.2,-0.95) 4(1.2,-0.95) 5(1.2,0.95)
  silkscreen extent -1.47,-1.5 0.25,1.8, body extent -0.85,-1.5 0.85,1.5, height 1.45
Testpt_055 [mm]
  round 0.9 hole 0.55: 1(0,0)

## Part data
C1 C2 C7 C8 C9: library part GRT033C81A104KE01D, "CAP CER 0.1UF 10V X6S 0201", Digi-Key Part Number=490-12232-1-ND, Manufacturer="Murata Electronics North America", Operating Temperature="-55°C ~ 105°C", Package / Case="0.024\" L x 0.012\" W (0.60mm x 0.30mm)", Ratings=AEC-Q200, Temperature Coefficient=X6S, Tolerance=±10%, Voltage=10V, @ qty=0, Applications=Automotive, Datasheets=http://search.murata.co.jp/Ceramy/image/img/A01X/G101/ENG/GRT033C81A104KE01-01.pdf, Factory Stock=0, Failure Rate="Surface Mount, MLCC", Features=-, Height - Seated (Max)="0.013\" (0.33mm)", Image=//media.digikey.com/Renders/Murata%20Renders/GRT%20Series%200201%20(0603%20Metric).jpg, Lead Spacing=-, Minimum Quantity=1, Mounting Type="0201 (0603 Metric)", Packaging="Cut Tape (CT)", Part Number=GRT033C81A104KE01D, Part Status=Active, Quantity Available=1647, Series=GRT, Size / Dimension=-, Thickness (Max)=-, Unit Price (USD)=0.1
C3 C4 C5 C6 C10 C12 C13 C14 C15 C16 C17 C18 C19 C20 C21 C22 C23 C24 C25 C26 C28 C29 C30 C31 C32 C34 C35 C36 C37 C38 C39 C40 C41 C42 C66 C67 C68 C69 C70 C71 C72 C73 C74 C75 C77 C78 C79 C80 C81 C82 C83 C112 C113 C114 C1001: "Capacitor", LatestRevisionDate=17-Jul-2002, LatestRevisionNote="Re-released for DXP Platform.", PackageDescription="Radial Cap, Thru-Hole; 2 Leads; 0.3 in Pin Spacing", PackageReference=RAD-0.3, Published=8-Jun-2000, Publisher="Altium Limited"
C11 C27 C33 C76: library part Cap, "Capacitor", LatestRevisionDate=17-Jul-2002, LatestRevisionNote="Re-released for DXP Platform.", PackageDescription="Radial Cap, Thru-Hole; 2 Leads; 0.3 in Pin Spacing", PackageReference=RAD-0.3, Published=8-Jun-2000, Publisher="Altium Limited"
D1 D2 D3: "Typical BLUE SiC LED", DatasheetVersion=16-Apr-2002, LatestRevisionDate=17-Dec-2003, LatestRevisionNote="PCB Footprint replaced.", PackageDescription="SM LED; 2 C-Bend Leads; Body 3.5 x 2.8 x 1.9 mm, inc leads (LxWxH typ)", PackageReference=3.5X2.8X1.9, PackageVersion=16-Apr-2002, Published=8-Jun-2000, Publisher="Altium Limited"
J1: "CONNECTOR MICRO USB"
P1 P4: "Header, 16-Pin", LatestRevisionDate=17-Jul-2002, LatestRevisionNote="Re-released for DXP Platform.", Publisher="Altium Limited"
P2 P3: "Header, 14-Pin", LatestRevisionDate=17-Jul-2002, LatestRevisionNote="Re-released for DXP Platform.", Publisher="Altium Limited"
P5: "Header, 3-Pin", LatestRevisionDate=17-Jul-2002, LatestRevisionNote="Re-released for DXP Platform.", Publisher="Altium Limited"
P6: "Header, 2-Pin", LatestRevisionDate=17-Jul-2002, LatestRevisionNote="Re-released for DXP Platform.", Publisher="Altium Limited"
P7: "Header, 2-Pin, Dual row", LatestRevisionDate=17-Jul-2002, LatestRevisionNote="Re-released for DXP Platform.", Publisher="Altium Limited"
R1 R2 R6 R7 R17 R20 R21 R22 R27 R28 R30 R31 R32 R74 R75 R76 R77 R84 R86 R1003: library part Res2, "Resistor", LatestRevisionDate=17-Jul-2002, LatestRevisionNote="Re-released for DXP Platform.", PackageDescription="Axial Device, Thru-Hole; 2 Leads; 0.4 in Pin Spacing", PackageReference=AXIAL-0.4, Published=8-Jun-2000, Publisher="Altium Limited"
R3 R12 R13 R14 R15 R16 R18 R19 R23 R24 R25 R26 R29 R79 R81 R82 R83 R87 R1002: "Resistor", LatestRevisionDate=29-May-2009, LatestRevisionNote="IPC-7351 Footprint Added.", PackageDescription="Chip Resistor", PackageReference=J1-0603, Published=8-Jun-2000, Publisher="Altium Limited"
R4 R5 R8 R9 R10 R11 R33 R34 R78 R80 R85: library part Res3, "Resistor", LatestRevisionDate=29-May-2009, LatestRevisionNote="IPC-7351 Footprint Added.", PackageDescription="Chip Resistor", PackageReference=J1-0603, Published=8-Jun-2000, Publisher="Altium Limited"
U1: "Regulator"
U2 U3 U6 U7 U8 U9: "Linear Regulator"
U1000: "8-Channel, 24-Bit Analog-To-Digital Converter With Integrated ECG Front End", Manufacturer="Texas Instruments", PACKAGE_DESIGNATOR=ZXG, Copyright="Copyright (C) 2018 Accelerated Designs. All rights reserved", Datasheet_URL=http://www.ti.com/lit/gpn/ADS1298, FAMILY_NAME="ECG / EEG Analog Front End", GENERIC_PART_NUMBER=ADS1298, INDUSTRY_STD_PKG_TYPE=NFBGA, PIN_COUNT=64, RefDes=RefDes, Type=DEV
L1 L2 L3 L4: Code_IEC=1005, Code_JEITA=0402, LatestRevisionDate=29-May-2009, LatestRevisionNote="IPC-7351 Footprint Added.", PackageDescription="Chip Inductor", PackageReference=0402-A, Published=8-Jun-2000, Publisher="Altium Limited"

## Via types
v1: diameter 0.6, hole 0.3, Top Layer to Bottom Layer, tented both sides, 112 vias
v2: diameter 0.35, hole 0.15, Top Layer to Bottom Layer, tented both sides, 75 vias
v3: diameter 0.8, hole 0.5, Top Layer to Bottom Layer, tented both sides, 3 vias

## Nets (pads, with @x,y where several pads share a name; then routed paths per layer and width w, separated by ;. In a path a pad name is that pad's centre, name@x,y a point inside that pad or via, vN(x,y) a via of type N, cw(c..) or ccw(c..) an arc to the next point about the centre after c; other vN are vias at no path point)
AVDD: C1.1 C2.1 C7.1 C8.1 C9.1 C10.1 C25.1 C66.2 C67.2 C68.2 C69.2 C70.2 C71.2 C112.2 C1001.2 L3.2 R10.2 R11.2 U18.19 U18.21 U18.22 U18.54 U18.56 U18.59 U1000.A4 U1000.A6 U1000.A7 U1000.B4 U1000.B6 U1000.C6 | length 56
  Top Layer w0.15: R10.2@36.995,37.441 37.222,37.667 v2@37.222,38.777 ; U1000.B6@38.792,42.595 38.389,42.192 38.389,40.928 38.261,40.8 C2.1@38.261,39.545 C8.1@38.975,39.545 ; U1000.C6@38.792,43.395 39.182,43.005 39.182,41.205 38.975,40.998 C8.1@38.975,39.545 ; v2(39.631,39.55) 39.627,39.545 C8.1@38.975,39.545 ; U1000.A4@40.392,41.795 40.392,41.121 40.292,41.02 C1.1@40.292,39.545 41.326,39.545 C7.1@41.337,39.556 ; U1000.B4@40.392,42.595 40.785,42.202 40.785,41.049 41.337,40.498 C7.1@41.337,39.556 ; v2(41.967,39.554) 41.965,39.556 C7.1@41.337,39.556
  Top Layer w0.191: v2@37.222,38.777 37.222,39.1 C10.1@36.591,39.731 36.591,40.394 U1000.A7@37.992,41.795
  Top Layer w0.2: U18.54@39.162,16.694 U18.54@39.116,16.648 39.116,13.741 v1(39.533,13.324) ; U18.56@40.089,16.02 40.089,16.621 U18.56@40.116,16.648 ; U18.56@40.156,15.927 40.156,14.426 C69.2@41.786,12.796 ; U18.59@41.616,16.648 41.616,15.551 42.337,14.83 C67.2@42.991,14.83 44.091,14.83 v1(44.197,14.935) ; U18.22@41.616,27.798 41.616,30.723 C66.2@41.705,30.812 v1@41.705,31.792 ; v1(41.701,31.788) v1@41.705,31.792 ; U18.21@42.116,27.798 42.143,27.825 v1(42.143,29.72) ; U18.19@43.116,27.798 43.116,29.124 42.946,29.294 v1(42.946,30.944) 43.582,30.944 44.27,31.632 C1001.2@44.27,32.11 ; C70.2@43.229,32.11 42.023,32.11 v1@41.705,31.792
  Top Layer w0.508: v1(44.125,13.787) 44.127,13.785 C25.1@44.127,12.924
  Bottom Layer w0.15: R11.2@36.995,37.441 36.995,38.551 v2(37.225,38.78) ; C9.1@38.781,40.915 38.792,40.926 v2(38.792,41.795)
  Bottom Layer w0.2: v1(40.685,13.911) 40.789,13.807 C71.2@41.787,13.807 ; v1(42.143,29.72) 42.095,29.672 42.256,29.51 C112.2@42.256,28.363
  Bottom Layer w0.508: L3.2@44.174,12.062 44.174,13.738 v1(44.125,13.787) 45.25,14.912 v1(45.25,15.435)
AVSS: C1.2 C2.2 C7.2 C8.2 C9.2 C10.2 C11.1 C15.1 C28.1 C34.1 C35.1 C36.1 C37.1 C38.1 C39.1 C66.1 C67.1 C68.1 C69.1 C74.1 C75.1 C76.1 C77.1 C78.1 C79.1 C80.1 C81.1 C82.1 C83.1 C112.1 C113.2 C114.2 L4.2 R33.1 R34.1 R85.1 R87.1 U18.20 U18.23 U18.25 U18.32 U18.53 U18.57 U18.58 U1000.A5 U1000.A8 U1000.B5 U1000.C5 U1000.D4 U1000.D5 U1000.H4 | length 67.7
  Top Layer w0.15: v2(39.59,42.593) 39.592,42.592 v2(39.592,41.795)
  Top Layer w0.191: v2(33.893,40.362) 33.9,40.369 C38.1@33.9,41.768 ; v2(35.607,38.82) 35.607,40.21 U1000.A8@37.192,41.795 ; v2(38.265,38.244) 38.261,38.247 C2.2@38.261,39.075 C8.2@38.975,39.075 ; C1.2@40.292,39.075 40.302,39.086 C7.2@41.337,39.086 41.891,38.531 v2(41.891,38.509)
  Top Layer w0.2: C80.1@34.827,32.898 v1(34.827,34.159) ; C83.1@36.518,32.912 v1(36.518,34.169) ; U18.25@40.116,27.798 40.124,27.79 v1(40.124,26.165)
  Top Layer w0.203: v1(34.718,30.5) 34.962,30.255 C74.1@34.962,29.366 36.272,29.366 36.616,29.022 U18.32@36.616,27.798 ; v1(34.827,34.159) 35.309,34.159 35.672,33.796 R85.1@35.672,33.306 ; R87.1@37.363,33.306 37.363,34.43 37.608,34.676 v1(38.237,34.676) C79.1@38.237,33.162 C78.1@40.008,33.162 ; C68.1@37.962,14.569 37.962,14.914 38.616,15.568 U18.53@38.616,16.648 ; v1(38.684,11.341) 38.761,11.265 C82.1@39.549,11.265 C81.1@40.43,11.265 ; v1(40.244,18.72) 40.616,18.348 U18.57@40.616,16.648 ; C11.1@40.412,51.839 40.412,52.627 v1(40.427,52.641) ; C66.1@40.705,30.812 40.705,29.959 41.116,29.547 U18.23@41.116,27.798 41.116,26.149 v1(41.108,26.141) ; C69.1@41.786,13.796 40.616,14.966 U18.57@40.616,16.648 ; v1@42.068,22.263 v1(42.08,22.263) ; v1(42.111,26.028) 42.616,26.534 U18.20@42.616,27.798 ; C67.1@42.84,13.98 42.424,13.98 41.116,15.288 U18.58@41.116,16.648 U18.57@40.616,16.648
  Top Layer w0.254: v2(35.978,49.622) C34.1@36.882,49.622 36.868,49.637 R34.1@36.868,51.377 ; v2(39.59,42.593) U1000.B5@39.592,42.595 U1000.C5@39.592,43.395 U1000.C5@39.592,43.395 39.592,43.398 U1000.D5@39.592,44.195 v2(40.392,44.195) ; v2(41.173,51.319) C35.1@41.173,50.406 42.012,50.406 C36.1@42.031,50.426
  Top Layer w0.406: C28.1@37.929,12.407 37.929,13.557 v1(37.785,13.701) 37.785,14.392 C68.1@37.962,14.569
  Bottom Layer w0.15: C9.2@39.251,40.915 39.592,41.256 v2(39.592,41.795)
  Bottom Layer w0.2: v1(40.124,26.165) 40.124,25.101 C113.2@40.181,25.044 ; C114.2@40.142,19.734 40.142,18.822 v1(40.244,18.72)
  Bottom Layer w0.203: v1(42.08,22.263) 42.091,22.275 43.744,22.275 C76.1@44.675,21.345 ; C75.1@42.154,24.988 42.111,25.031 v1(42.111,26.028) 42.03,26.109 42.256,26.335 C112.1@42.256,27.363
  Bottom Layer w0.254: v2(35.978,49.622) R33.1@36.882,49.622 ; v2(41.173,51.319) 41.179,51.314 C15.1@41.179,50.401
  Bottom Layer w0.406: L4.2@35.996,13.248 36.046,13.198 37.05,13.198 37.553,13.701 v1(37.785,13.701)
  other v2: 40.392,47.395
GND: C3.1 C4.2 C5.1 C6.1 C12.1 C13.1 C14.2 C17.2 C18.2 C19.2 C20.2 C21.2 C22.2 C23.2 C24.2 C25.2 C26.2 C27.2 C28.2 C29.2 C30.2 C31.2 C32.2 C33.2 C40.1 C41.2 C42.1 C70.1 C71.1 C72.1 C73.1 C74.2 C75.2 C113.1 C114.1 C1001.1 J1.6 P2.14 P3.14 P6.1 P7.3 P7.4 R1.1 R2.1 R6.1 R7.1 R8.1 R9.1 R20.1 R22.1 R27.1 R28.1 R32.2 R74.1 R75.1 R76.1 R77.1 R80.1 R86.2 U1.2 U2.2 U3.2 U6.4 U7.2 U8.1 U9.2 U12.1 U18.33 U18.49 U18.51 U1000.C7 U1000.D7 U1000.H7 | length 103.9
  Top Layer w0.2: v1@42.106,21.345 v1(42.147,21.345)
  Top Layer w0.203: v1(13.881,36.463) C6.1@13.881,37.487 ; C18.2@22.819,4.938 v1(22.819,6.054) ; v2(26.375,45.645) 27.173,45.645 R32.2@27.367,45.839 ; v1(32.168,29.321) C74.2@33.824,29.321 ; v1(32.263,26.708) 32.997,25.973 U18.33@34.791,25.973 ; v2(33.067,42.662) 33.07,42.659 C13.1@33.853,42.659 ; v1(33.084,15.521) C73.1@33.084,16.328 ; v1(34.78,16.221) 35.207,16.648 U18.49@36.616,16.648 ; C29.2@35.476,13.216 35.476,12.697 35.805,12.368 v1(36.137,12.368) 36.176,12.407 C28.2@36.929,12.407 ; C30.2@35.495,11.026 35.643,10.878 v1(35.643,9.693) ; v1(36.704,18.819) 37.599,17.924 U18.51@37.599,16.661 ; v1(38.036,5.857) 38.022,5.871 38.022,6.56 38.022,7.327 C33.2@38.044,7.35 ; C1001.1@44.27,33.11 v1(44.27,33.933) ; C23.2@45.127,11.188 C24.2@45.127,12.121 C25.2@45.127,12.924 ; v1(45.259,7.549) 45.296,7.512 45.296,4.629 C26.2@45.27,4.603 ; v1@46.377,12.1 v1(46.464,12.013) 46.464,11.734 C27.2@47.03,11.168
  Top Layer w0.305: R27.1@7.359,39.94 8.86,39.94 9.383,39.417 v2(9.383,39.395) ; v2(11.444,31.375) 11.474,31.375 C41.2@11.474,30.346 ; v2(11.445,22.912) 11.468,22.935 R20.1@11.468,20.851 ; R22.1@16.472,26.539 v2(17.817,25.193) ; R9.1@19.14,45.07 20.004,45.07 v1(20,45.073) ; C17.2@20.206,4.211 20.206,2.733 v2(20.485,2.454) ; v2(22.196,22.393) R80.1@22.786,22.983 ; v1(32.18,44.161) 32.36,44.341 C12.1@34.06,44.341 ; v2(33.998,3.827) 34.006,3.827 C31.2@34.604,4.425 34.622,4.443 U8.1@34.622,6.283 ; v1(34.303,15.159) 34.557,14.905 C72.1@34.557,14.327 ; v2(37.992,43.374) U1000.C7@37.992,43.395 ; v2(37.994,44.195) v2(37.994,44.195) 37.993,44.194 U1000.D7@37.995,44.194 ; v1(42.544,33.795) C70.1@43.229,33.11 ; C25.2@45.127,12.924 45.138,12.924 v1(45.967,13.753)
  Top Layer w0.508: J1.6@4.305,14.53 3.849,14.074 2.319,14.074 J1.6@1.875,13.63 J1.6@1.875,16.43 J1.6@1.875,18.83 J1.6@1.875,21.63 3.405,21.63 J1.6@4.305,20.73 4.938,21.363 5.793,21.363 v3(6.658,22.229) ; v1(9.889,12.643) 9.892,12.646 R28.1@9.892,15.769 ; C6.1@13.881,37.487 14.381,37.487 14.702,37.166 U1.2@15.348,37.166 ; C5.1@19.215,37.36 C4.2@20.358,37.36 ; C3.1@20.35,35.828 20.35,37.352 v3(21.374,37.352) ; C20.2@25.632,6.797 v1(26.981,6.797) C21.2@28.339,6.797 ; U6.4@27.021,2.707 28.026,2.707 v1(28.226,2.907) 28.457,3.139 C22.2@28.87,3.139
  Bottom Layer w0.2: R77.1@42.111,20.375 42.111,21.309 v1(42.147,21.345)
  Bottom Layer w0.203: C19.2@22.819,4.938 v1(22.819,6.054) ; R86.2@37.138,30.437 38.005,30.437 38.671,29.77 v1(38.671,25.852)
  Bottom Layer w0.305: v2(4.614,31.169) 4.631,31.169 C42.1@4.631,30.322 ; v2(5.772,30.293) 5.781,30.284 U3.2@7.024,30.284 ; v2(11.444,31.375) 11.444,30.376 C40.1@11.474,30.346 ; C14.2@22.761,46.222 22.761,46.164 v2(23.344,45.58) ; C32.2@28.004,34.1 v1@29.69,34.1 ; U9.2@29.69,31.976 v1@29.69,34.1 ; U2.2@29.963,51.667 29.963,53.548 v1(29.965,53.55) ; v1(30.99,40.732) 30.995,40.728 R8.1@30.995,39.742 ; R2.1@39.006,36.88 43.104,36.88 v2(43.121,36.863) ; v1(39.159,20.734) C114.1@40.142,20.734 ; v1(39.287,24.039) 39.293,24.044 C113.1@40.181,24.044 ; v1(41.248,23.944) 41.292,23.988 C75.2@42.154,23.988 ; v1(42.144,11.6) 41.787,11.957 C71.1@41.787,12.807 R75.1@42.59,12.807 ; v1(42.147,21.345) 42.166,21.363 R74.1@42.953,21.363 43.807,20.509 R76.1@43.807,20.375
  other v1: 48.42,3.508 49.444,6.188 48.42,8.709 49.467,10.662 51.12,22.962 19.358,27.758 51.682,28.021 20.643,30.187 50.988,30.898 48.376,32.75 21.533,33.114 29.694,34.104 49.698,35.329 49.268,37.875 50.525,41.446 49.93,47.001 50.955,49.216 48.21,52.887 52.079,53.085
  other v2: 37.992,47.395
NetC3_2: C3.2 U1.4 | length 1.8
  Top Layer w0.2: U1.4@17.748,36.216 18.446,36.216 18.834,35.828 C3.2@19.35,35.828
NetC11_2: C11.2 U1000.D3 | length 7
  Top Layer w0.15: C11.2@40.412,50.839 40.412,48.945 40.792,48.565 40.792,44.595 U1000.D3@41.192,44.195
NetC15_2: C15.2 U1000.G3 | length 2.8
  Top Layer w0.15: U1000.G3@41.192,46.595 v2(41.192,46.597)
  Bottom Layer w0.15: C15.2@41.179,49.401 41.19,49.39 41.19,46.599 v2(41.192,46.597)
NetC16_1: C16.1 U6.3 | length 1.9
  Top Layer w0.2: U6.3@24.64,2.725 24.897,2.725 25.326,2.297 C16.1@25.326,1.224
NetC16_2: C16.2 U6.5 | length 4.2
  Top Layer w0.2: C16.2@26.326,1.224 25.931,1.618 25.931,3.894 26.427,4.389 26.803,4.389 U6.5@27.021,4.607
NetC18_1: C18.1 C19.1 C26.1 L1.2 R17.2 U6.2 U7.1 | length 12.7
  Top Layer w0.305: v1(21.959,3.934) 21.963,3.938 C18.1@22.819,3.938 23.099,3.657 U6.2@24.621,3.657 ; v1(43.258,4.595) C26.1@44.052,4.595 ; U7.1@44.346,6.338 44.346,4.679 C26.1@44.27,4.603 44.262,4.595 44.262,3.818 44.7,3.38 R17.2@45.213,3.38
  Top Layer w0.508: C26.1@44.052,4.595 C26.1@44.262,4.595 ; v1(44.284,1.28) 45.213,2.209 R17.2@45.213,3.38
  Bottom Layer w0.2: v1(43.258,4.595) v1@43.379,4.474
  Bottom Layer w0.305: L1.2@20.223,3.884 20.277,3.83 v1@21.959,3.83 ; v1(21.959,3.934) 22.815,3.934 C19.1@22.819,3.938
  other v1: 41.778,6.132
NetC20_1: C20.1 C21.1 L2.1 U6.1 | length 6.6
  Top Layer w0.305: U6.1@24.621,4.607 U6.1@24.621,4.786 ; C20.1@25.607,5.771 C20.1@25.632,5.797 ; L2.1@30.506,5.797 L2.1@30.59,5.712
  Top Layer w0.508: U6.1@24.621,4.786 C20.1@25.607,5.771 ; C20.1@25.632,5.797 C21.1@28.339,5.797 L2.1@30.506,5.797